# Altium PCB MergeBoard.PcbDoc
Units mil, origin at the board's own origin, x right, y up, seen from the top; angles counter-clockwise.
Board outline 5500 x 4413.39 mil, 2 copper layers (Top Layer, Bottom Layer); 55 components, 46 nets, 339 pads, 84 vias.
Unrouted connection lines stored in the file: 3.
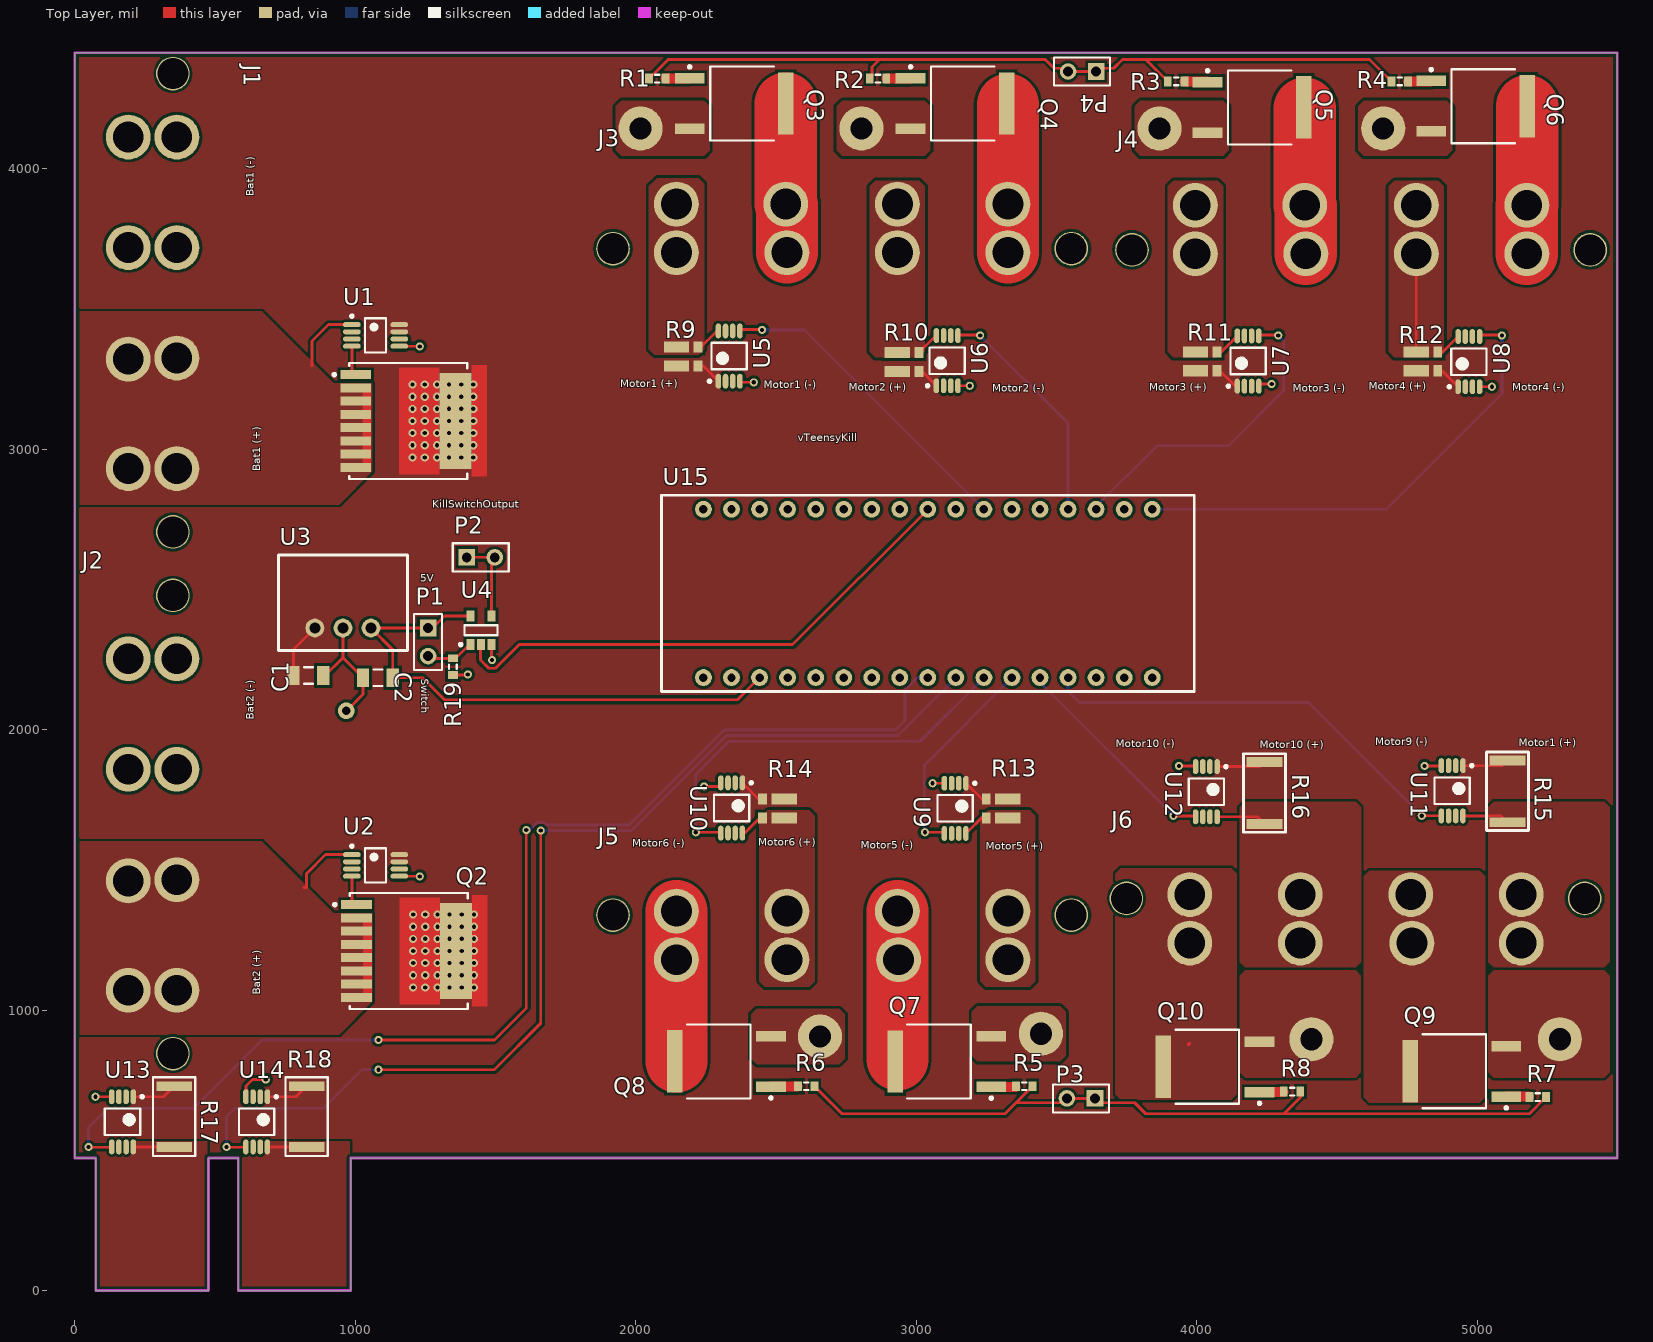
[diagram p0: Top Layer view]
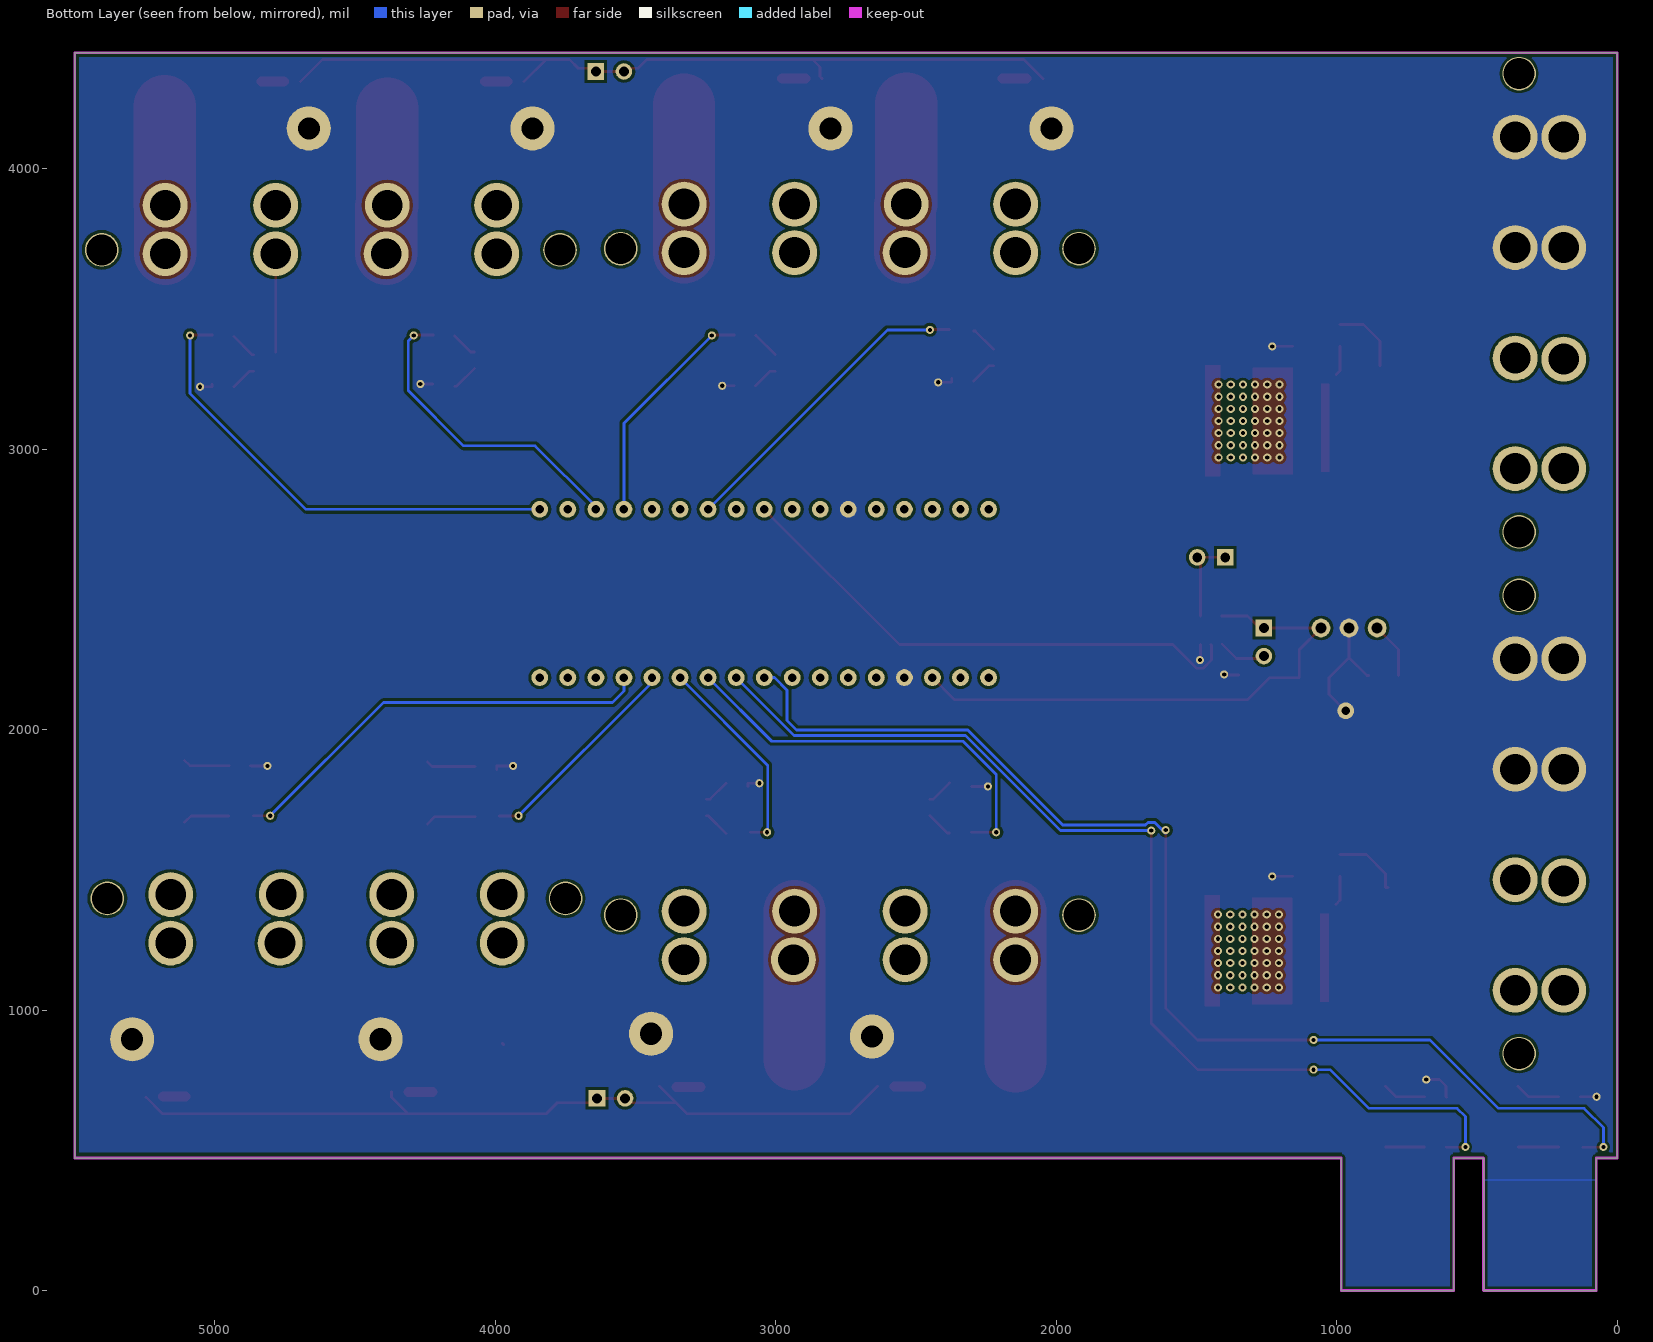
[diagram p1: Bottom Layer view, seen from below]

## Layer stack, top to bottom
Top Solder: solder mask 0.4, Solder Resist, Dk 3.5
Top Layer: signal copper 1.4
Dielectric 1: dielectric 12.6, FR-4, Dk 4.8
Bottom Layer: signal copper 1.4
Bottom Solder: solder mask 0.4, Solder Resist, Dk 3.5

## Board outline
74.8,472.44 74.8,0 476.38,0 476.38,472.44 582.68,472.44 582.68,0 984.25,0 984.25,472.44 5500,472.44 5500,4413.39 0,4413.39 0,472.44

## Design rules (kind name [scope] priority, off if disabled: settings)
Clearance [All] p1: gap=10
PolygonConnect PolygonConnect_8 [All vs IsNamedPolygon('GND')] p1: connectstyle=Direct reliefconductorwidth=10 reliefentries=4 polygonreliefangle="90 Angle" airgapwidth=10
PolygonConnect PolygonConnect_7 [All vs IsNamedPolygon('PWR')] p2: connectstyle=Direct reliefconductorwidth=10 reliefentries=4 polygonreliefangle="90 Angle" airgapwidth=10
PolygonConnect PolygonConnect_6 [All vs IsNamedPolygon('Power')] p3: connectstyle=Direct reliefconductorwidth=10 reliefentries=4 polygonreliefangle="90 Angle" airgapwidth=10
PolygonConnect PolygonConnect_5 [All vs IsNamedPolygon('Power')] p4: connectstyle=Direct reliefconductorwidth=10 reliefentries=4 polygonreliefangle="90 Angle" airgapwidth=10
PolygonConnect PolygonConnect_4 [All vs IsNamedPolygon('VideoRayTrace')] p5: connectstyle=Direct reliefconductorwidth=10 reliefentries=4 polygonreliefangle="90 Angle" airgapwidth=10
PolygonConnect PolygonConnect_3 [All vs IsNamedPolygon('T100Trace')] p6: connectstyle=Direct reliefconductorwidth=10 reliefentries=4 polygonreliefangle="90 Angle" airgapwidth=10
PolygonConnect PolygonConnect_2 [All vs IsNamedPolygon('Top Layer-No Net')] p7: connectstyle=Direct reliefconductorwidth=10 reliefentries=4 polygonreliefangle="90 Angle" airgapwidth=10
PolygonConnect PolygonConnect_1 [All vs IsNamedPolygon('Top Layer-No Net')] p8: connectstyle=Direct reliefconductorwidth=10 reliefentries=4 polygonreliefangle="90 Angle" airgapwidth=10
PolygonConnect [All] p9: connectstyle=Relief reliefconductorwidth=10 reliefentries=4 polygonreliefangle="90 Angle" airgapwidth=10
RoutingVias [All] p1: holewidth=28 width=50 viastyle="Through Hole" minholewidth=28 minwidth=50 maxholewidth=28 maxwidth=50
SolderMaskExpansion [All] p1: expansion=4
Width [All] p1: maxlimit=1181.1 minlimit=10 preferedwidth=10
30 further rules are at their usual default settings.

## Classes and differential pairs
component class U_5V_Converter: C1 C2 U3
component class U_KillSwitch_MotorOut: J3 J4 J5 J6 P1 Q3 Q4 Q5 Q6 Q7 Q8 Q9 Q10 R1 R2 R3 R4 R5 R6 R7 R8 R19 U4
component class U_Merge: J1 J2 Q2 U1 U2
component class U_PowerOutCurrentMonitor: R17 R18 U13 U14
component class U_T100CurrentMonitor: R9 R10 R11 R12 R13 R14 U5 U6 U7 U8 U9 U10
component class U_Teensy3_5: U15
component class U_VidRayCurrentMonitor: R15 R16 U11 U12

## Components (designator, comment, footprint, x,y, rotation, side; value= is the part's Value field where it differs from the comment)
C1 "Cap Semi" C1206 832.68,2192.91 r180 top
C2 "Cap Semi" C1206 1080.71,2185.04 r0 top
J1 "Molex 42819-4224" MOLEX_42819-4224 190.94,2930.87 r90 top
J2 "Molex 42819-4224" MOLEX_42819-4224 190.94,1070.63 r90 top
J3 "Molex 42819-4224" MOLEX_42819-4224 2145.37,3873.79 r0 top
J4 "Molex 42819-4224" MOLEX_42819-4224 3995.54,3869.63 r0 top
J5 "Molex 42819-4224" MOLEX_42819-4224 3327.29,1179.58 r180 top
J6 "Molex 42819-4224" MOLEX_42819-4224 5157.86,1238.99 r180 top
P1 "Header 2" HDR1X2 1259.84,2362.2 r270 top
P2 "KillHeader" HDR1X2 1397.64,2614.17 r0 top
P3 "KillHeader" HDR1X2 3637.8,685.04 r180 top
P4 "KillHeader" HDR1X2 3641.73,4346.46 r180 top
Q2 "IPT004N03L" INF-PG-HSOF-8-1_V 1210.63,1210.63 r0 top
Q3 "IRLR6225" IRLR6225 2352.36,4232.28 r0 top
Q4 "IRLR6225" IRLR6225 3139.76,4232.28 r0 top
Q5 "IRLR6225" IRLR6225 4198.82,4218.5 r0 top
Q6 "IRLR6225" IRLR6225 4996.06,4222.87 r0 top
Q7 "IRLR6225" IRLR6225 3108.39,816.38 r180 top
Q8 "IRLR6225" IRLR6225 2322.83,816.93 r180 top
Q9 "IRLR6225" IRLR6225 4945,781.53 r180 top
Q10 "IRLR6225" IRLR6225 4064.96,797.6 r180 top
R1 "Res3" J1-0603 2076.77,4320.87 r180 top
R2 "Res3" J1-0603 2864.17,4320.87 r180 top
R3 "Res3" J1-0603 3927.17,4311.02 r180 top
R4 "Res3" J1-0603 4724.41,4311.02 r180 top
R5 "Res3" J1-0603 3385.83,728.35 r0 top
R6 "Res3" J1-0603 2608.27,728.35 r0 top
R7 "Res3" J1-0603 5216.54,689.33 r0 top
R8 "Res3" J1-0603 4340.55,709.01 r0 top
R9 "Res3" Resistor075mohms 2190.95,3297.24 r90 top
R10 "Res3" Resistor075mohms 2978.35,3277.56 r90 top
R11 "Res3" Resistor075mohms 4041.34,3279.53 r90 top
R12 "Res3" Resistor075mohms 4828.74,3279.53 r90 top
R13 "Res3" Resistor075mohms 3281.5,1751.97 r270 top
R14 "Res3" Resistor075mohms 2484.25,1751.97 r270 top
R15 "Res3" Resistor03mOhm 5108.27,1779.88 r270 top
R16 "Res3" Resistor03mOhm 4242.13,1773.98 r270 top
R17 "Res3" Resistor05MOHM 354.33,620.08 r270 top
R18 "Res3" Resistor05MOHM 826.77,620.08 r270 top
R19 "Res3" J1-0603 1348.43,2224.41 r90 top
U1 "LTC4357CMS8#PBF" LT-MS8-8_N 1072.83,3405.51 r0 top
U2 "LTC4357CMS8#PBF" LT-MS8-8_N 1072.83,1515.75 r0 top
U3 "Recom-785.0-1.0" Recom-78E5.0-1.0 856.3,2362.2 r0 top
U4 "U?" NC7SZ08M5X 1448.82,2354.33 r90 top (schematic designator NC7SZ08M5X)
U5 "CurrentMonitor" AD8217 2333.15,3331.81 r90 top
U6 "CurrentMonitor" AD8217 3110.71,3315.43 r90 top
U7 "CurrentMonitor" AD8217 4183.54,3314.06 r90 top
U8 "CurrentMonitor" AD8217 4970.94,3312.01 r90 top
U9 "CurrentMonitor" AD8217 3139.29,1719.21 r270 top
U10 "CurrentMonitor" AD8217 2342.05,1720.59 r270 top
U11 "CurrentMonitor" AD8217 4911.42,1781.85 r270 top
U12 "CurrentMonitor" AD8217 4034.96,1778.62 r270 top
U13 "CurrentMonitor" AD8217 170.28,601.38 r270 top
U14 "CurrentMonitor" AD8217 648.62,601.38 r270 top
U15 "ArduinoMicro" ArduinoMicro 2241.73,2185.43 r0 top

## Footprints (in the part's own frame and the unit in brackets; to place one, negate y for a bottom-side part, rotate by r counter-clockwise, add the part's x,y. Pads: shape width x height; smd on the part's side, far side on the other; paste and mask are expansions set on the pad)
AD8217 [mm] "CurrentMonitor"
  oval 1.35x0.5 smd: 1(-2.275,0.975) 2(-2.275,0.325) 3(-2.275,-0.325) 4(-2.275,-0.975) 5(2.275,-0.975) 6(2.275,-0.325) 7(2.275,0.325) 8(2.275,0.975)
  silkscreen extent -2.4,-1.6 1.2,1.9, body extent -2.45,-1.6 2.45,1.6, height 1.1
ArduinoMicro [mil]
  round 60 hole 30: 1(0,0) 1-2(0,600) 2(100,0) 2-2(100,600) 3(200,0) 3-2(200,600) 4(300,0) 4-2(300,600) 5(400,0) 5-2(400,600) 6(500,0) 6-2(500,600) 7(600,0) 7-2(600,600) 8(700,0) 8-2(700,600) 9(800,0) 9-2(800,600) 10(900,0) 10-2(900,600) 11(1000,0) 11-2(1000,600) 12(1100,0) 12-2(1100,600) 13(1200,0) 13-2(1200,600) 14(1300,0) 14-2(1300,600) 15(1400,0) 15-2(1400,600) 16(1500,0) 16-2(1500,600) 17(1600,0) 17-2(1600,600)
  silkscreen extent -150,-50 1750,650
C1206 [mm] "Chip Capacitor, Body 3.2x1.6mm, IPC High Density"
  rect 1.1x1.7 smd: 1(-1.35,0) 2(1.35,0)
  silkscreen extent -0.4,-0.75 0.4,0.75, body extent -1.7,-0.9 1.7,0.9, height 1.3
HDR1X2 [mm] "Connector; Header; 2 Position"
  rect 1.5x1.5 hole 0.9: 1(0,0)
  round 1.5 hole 0.9: 2(2.54,0)
  silkscreen extent -1.27,-1.27 3.81,1.27
INF-PG-HSOF-8-1_V [mm] "HSOF, 8-Leads, Body 11.675x9.9mm, Pitch 1.2mm"
  rect 2.8x0.8 smd: 1(-5.249,4.2) 2(-5.249,3) 3(-5.249,1.8) 4(-5.249,0.6) 5(-5.249,-0.6) 6(-5.249,-1.8) 7(-5.249,-3) 8(-5.249,-4.2)
  rect 2.9x8.7 smd: 9(3.8,0)
  Top Layer region: -4.65,3.4 -4.65,-4.6 -3.85,-4.6 -3.85,3.4
  Top Layer region: 5.25,5.05 5.25,-5.05 6.65,-5.05 6.65,5.05
  Top Layer region: -1.35,4.85 -1.35,-4.85 2.35,-4.85 2.35,4.85
  silkscreen extent -7.32,-5.25 4.85,5.25, body extent -5.84,-4.95 5.84,4.95, height 2.4
IRLR6225 [mm] "D-PAK, 3-Pads, Body 6.21x6.73mm (max), IPC High Density"
  rect 2.7x0.95 smd: 1(-4.05,2.29) 2(-4.05,-2.29)
  rect 1.4x5.65 smd: Tab(4.65,0)
  silkscreen extent -4.17,-3.35 3.55,3.44, body extent -2.2,-3.37 4.02,3.37, height 2.38
J1-0603 [mm] "Chip Resistor, Body 1.6x0.8mm, IPC High Density"
  rect 0.7x0.9 smd: 1(-0.75,0) 2(0.75,0)
  silkscreen extent -0.2,-0.35 0.2,0.35, body extent -0.85,-0.48 0.85,0.48, height 0.9
LT-MS8-8_N [mm] "SOP, 8-Leads, Body 3.1x3.1mm, Pitch 0.65mm, IPC Medium Density"
  oval 1.6x0.45 smd: 1(-2.15,0.975) 2(-2.15,0.325) 3(-2.15,-0.325) 4(-2.15,-0.975) 5(2.15,-0.975) 6(2.15,-0.325) 7(2.15,0.325) 8(2.15,0.975)
  silkscreen extent -2.27,-1.55 0.95,1.87, body extent -1.55,-1.55 1.55,1.55, height 1.1
MOLEX_42819-4224 [mil]
  round 160 hole 110: 1(0,0) 1(0,-173) 2(390,0) 2(394,-173) 3(788,-173) 3(788,0) 4(1182,-173) 4(1182,0)
  round 120 hole 110: NC(-226,-159) NC(1408,-159)
  body extent -269,-380 1456,176, height 826
NC7SZ08M5X [mm] "NC7SZ08M5X"
  rect 1x0.7 smd: 1(-1.3,0.95) 2(-1.3,0) 3(-1.3,-0.95) 4(1.3,-0.95) 5(1.3,0.95)
  silkscreen extent -1.42,-1.5 0.45,1.97, body extent -0.85,-1.5 0.85,1.5, height 1.45
Recom-78E5.0-1.0 [mm]
  round 1.7 hole 1: 1(0,0) 2(2.54,0) 3(5.08,0)
  silkscreen extent -3.3,-2.03 8.38,6.6, body extent -3.3,-2.03 8.38,6.6, height 10.4
Resistor03mOhm [mm]
  rect 0.9x3.25 smd: 1(-2.8,0) 2(2.8,0)
  silkscreen extent -3.56,-1.91 3.56,1.91
Resistor05MOHM [mm]
  rect 0.9x3.2 smd: 1(-2.75,0) 2(2.75,0)
  silkscreen extent -3.56,-1.91 3.56,1.91
Resistor075mohms [mm]
  rect 1x2.3 smd: 1(0,1.15) 2(1.7,1.15)
  rect 1x0.8 smd: 1(0,-0.8) 2(1.7,-0.8)
  body extent -0.06,-0.89 1.59,2.16, height 0.65

## Part data
C1 C2: "Capacitor (Semiconductor SIM Model)"
J1 J2 J3 J4 J5 J6: library part Molex_42819-4224
P1: "Header, 2-Pin"
Q2: "N-Channel OptiMOS(TM) Power-MOSFET, 30 V VDS, 300 A ID, -55 to 175 degC, PG-HSOF-8, Reel, Green"
R1 R2 R3 R4 R5 R6 R7 R8 R9 R10 R11 R12 R13 R14 R15 R16 R17 R18 R19: "Resistor"
U1 U2: "Positive High Voltage Ideal Diode Controller, 9 to 80 V Vin, 8-pin SOP (MS8-8), 0 to 70 degC, Pb-Free"
U4: library part NC7SZ08M5X
U5 U6 U7 U8 U9 U10 U11 U12 U13 U14: library part AD8217

## Free pads (board coordinates)
  rect 110.24x31.5 smd: 1(1001.99,3265.75) 2(1001.99,3218.5) 3(1001.99,3171.26) 4(1001.99,3124.02) 5(1001.99,3076.77) 6(1001.99,3029.53) 7(1001.99,2982.28) 8(1001.99,2935.04)
  round 29.02 hole 15: 2(49.21,511.81) 2(73.82,690.94) 2(541.34,511.81) 2(681.1,751.97) 2(1082.68,787.4) 2(1082.68,893.7) 2(1230.31,1476.38) 2(1230.31,3366.14) 2(1401.57,2196.85) 2(1488.19,2248.03) 2(1610.24,1641.73) 2(1661.42,1639.76) 2(2214.57,1633.86) 2(2244.09,1797.24) 2(2421.26,3238.19) 2(2450.79,3425.2) 2(3031.5,1633.86) 2(3058.78,1808.78) 2(3191.46,3225.87) 2(3228.35,3405.51) 2(3917.32,1692.91) 2(3937.01,1870.43) 2(4267.72,3232.28) 2(4291.34,3405.51) 2(4803.15,1692.91) 2(4812.99,1870.43) 2(5053.15,3222.44) 2(5088.58,3405.51)
  round 157.48 hole 78.74: 3(2017.72,4143.7) 3(2657.48,905.51) 3(2805.12,4143.7) 3(3444.88,915.35) 3(3868.11,4143.7) 3(4409.45,896.02) 3(4665.35,4143.7) 3(5295.28,896.02)
  round 60 hole 30: 4(968.5,2066.93)
  rect 114.17x342.52 smd: 9(1358.27,3100.39)

## Via types
v1: diameter 29.02, hole 15, Top Layer to Bottom Layer, 84 vias

## Nets (pads, with @x,y where several pads share a name; then routed paths per layer and width w, separated by ;. In a path a pad name is that pad's centre, name@x,y a point inside that pad or via, vN(x,y) a via of type N, cw(c..) or ccw(c..) an arc to the next point about the centre after c; other vN are vias at no path point)
5V: C2.2 P1.1 U3.3 U4.5 U15.3 | length 1955.6
  Top Layer w10: U4.5 1318.9,2405.51 1275.59,2362.2 P1.1 U3.3 1133.86,2284.65 C2.2 1240.16,2185.04 1318.9,2106.3 2362.6,2106.3 U15.3
14.8V: C1.2 pad.9 Q2.9 R9.1 R10.1 R11.1 R12.1 R13.1 R14.1 R15.1 R16.1 R17.1 R18.1 U1.7 U1.8 U2.7 U2.8 U3.1 U5.1 U6.1 U7.1 U8.1 U9.1 U10.1 U11.1 U12.1 U13.1 U14.1 | length 1422
  Top Layer w10: U13.1 316.93,690.94 R17.1 ; U14.1 789.37,690.94 R18.1 ; C1.2 779.53,2285.43 U3.1 ; R9.1@2224.41,3297.24 2239.76,3297.24 U5.1 ; U10.1 2438.62,1751.97 R14.1@2450.79,1751.97 ; R10.1@3001.97,3277.56 3020.63,3277.56 U6.1 ; U9.1 3234.49,1751.97 R13.1@3248.03,1751.97 ; U12.1 4226.1,1868.19 R16.1 ; R11.1@4074.8,3287.4 4137.72,3224.49 U7.1 ; R12.1@4862.2,3277.56 4877.44,3277.56 U8.1 ; U11.1 5089.57,1871.42 R15.1
  other v1: 1206.69,1080.71 1250,1080.71 1293.31,1080.71 1336.61,1080.71 1379.92,1080.71 1423.23,1080.71 1206.69,1124.02 1250,1124.02 1293.31,1124.02 1336.61,1124.02 1379.92,1124.02 1423.23,1124.02 1206.69,1167.32 1250,1167.32 1293.31,1167.32 1336.61,1167.32 1379.92,1167.32 1423.23,1167.32 1206.69,1210.63 1250,1210.63 1293.31,1210.63 1336.61,1210.63 1379.92,1210.63 1423.23,1210.63 1206.69,1253.94 1250,1253.94 1293.31,1253.94 1336.61,1253.94 1379.92,1253.94 1423.23,1253.94 1206.69,1297.24 1250,1297.24 1293.31,1297.24 1336.61,1297.24 1379.92,1297.24 1423.23,1297.24 1206.69,1340.55 1250,1340.55 1293.31,1340.55 1336.61,1340.55 1379.92,1340.55 1423.23,1340.55 1204.72,2970.47 1248.03,2970.47 1291.34,2970.47 1334.65,2970.47 1377.95,2970.47 1421.26,2970.47 1204.72,3013.78 1248.03,3013.78 1291.34,3013.78 1334.65,3013.78 1377.95,3013.78 1421.26,3013.78 1204.72,3057.09 1248.03,3057.09 1291.34,3057.09 1334.65,3057.09 1377.95,3057.09 1421.26,3057.09 1204.72,3100.39 1248.03,3100.39 1291.34,3100.39 1334.65,3100.39 1377.95,3100.39 1421.26,3100.39 1204.72,3143.7 1248.03,3143.7 1291.34,3143.7 1334.65,3143.7 1377.95,3143.7 1421.26,3143.7 1204.72,3187.01 1248.03,3187.01 1291.34,3187.01 1334.65,3187.01 1377.95,3187.01 1421.26,3187.01 1204.72,3230.31 1248.03,3230.31 1291.34,3230.31 1334.65,3230.31 1377.95,3230.31 1421.26,3230.31
ANALOGOUT1: pad.2@2450.79,3425.2 U5.5 U15.11-2 | length 1129.8
  Top Layer w10: U5.5@2381,3426.18 pad.2@2449.8,3426.18 ; U15.11-2@3238.19,2788.98 U15.11-2
  Bottom Layer w10: pad.2@2450.79,3425.2 2601.97,3425.2 U15.11-2
ANALOGOUT2: pad.2@3228.35,3405.51 U6.5 U15.14-2 | length 820.9
  Top Layer w10: U6.5@3148.72,3406.5 pad.2@3217.52,3406.5 ; U15.14-2 U15.14-2@3543.31,2787.01
  Bottom Layer w10: pad.2@3228.35,3405.51 3541.73,3092.13 U15.14-2
ANALOGOUT3: pad.2@4291.34,3405.51 U7.5 U15.15-2 | length 1124.2
  Top Layer w10: U7.5@4221.55,3406.5 pad.2@4290.35,3406.5
  Bottom Layer w10: U15.15-2 3641.73,2795.28 3858.27,3011.81 4114.17,3011.81 4311.02,3208.66 4311.02,3385.83 pad.2@4291.34,3405.51
ANALOGOUT4: pad.2@5088.58,3405.51 U8.5 U15.17-2 | length 1710.1
  Top Layer w10: U15.17-2@3838.58,2788.58 U15.17-2 ; U8.5@5009.84,3406.5 pad.2@5087.6,3406.5
  Bottom Layer w10: U15.17-2@3838.58,2785.43 U15.17-2 4675.2,2785.43 5088.58,3198.82 pad.2@5088.58,3405.51
ANALOGOUT5: pad.2@3031.5,1633.86 U9.5 U15.12 | length 741
  Top Layer w10: pad.2@3031.5,1633.86 3090.55,1633.86
  Bottom Layer w10: pad.2@3031.5,1633.86 3029.27,1636.08 3029.27,1872.97 U15.12
ANALOGOUT6: pad.2@2214.57,1633.86 U10.5 U15.11 | length 1465.8
  Top Layer w10: pad.2@2214.57,1633.86 U10.5@2303.66,1633.86
  Bottom Layer w10: pad.2@2214.57,1633.86 2214.57,1785.04 ; 2214.59,1785.02 2214.59,1840.57 2332.68,1958.66 3014.96,1958.66 U15.11
ANALOGOUT7: pad.2@4803.15,1692.91 U11.5 U15.14 | length 1562.4
  Top Layer w10: pad.2@4793.4,1692.91 4803.15,1692.91 4862.2,1692.91
  Bottom Layer w10: U15.14 3541.73,2137.4 3582.68,2096.46 4399.61,2096.46 pad.2@4803.15,1692.91
ANALOGOUT8: pad.2@3917.32,1692.91 U12.5 U15.13 | length 758.3
  Top Layer w10: pad.2@3918.31,1691.93 U12.5@3987.11,1691.93
  Bottom Layer w10: U15.13 3441.73,2168.5 pad.2@3917.32,1692.91
ANALOGOUT9: pad.2@49.21,511.81 pad.2@1082.68,893.7 pad.2@1610.24,1641.73 U13.5 U15.9 | length 4256.6
  Top Layer w10: pad.2@50.2,510.83 U13.5@122.05,510.83 ; pad.2@1082.68,893.7 1496.06,893.7 1610.24,1007.87 pad.2@1610.24,1641.73
  Bottom Layer w10: pad.2@49.21,511.81 49.21,580.71 118.11,649.61 423.23,649.61 667.32,893.7 pad.2@1082.68,893.7 ; pad.2@1610.24,1641.73 1610.24,1630.31 1649.19,1669.27 1673.64,1669.27 1683.15,1659.76 1977.21,1659.76 2316.11,1998.66 2926.68,1998.66 2960.37,2032.36 2960.37,2140.43 3005.37,2185.43 U15.9
ANALOGOUT10: pad.2@541.34,511.81 pad.2@1082.68,787.4 pad.2@1661.42,1639.76 U14.5 U15.10 | length 3827.4
  Top Layer w10: pad.2@542.32,510.83 U14.5 ; pad.2@1082.68,787.4 1496.06,787.4 1661.42,952.76 pad.2@1661.42,1639.76
  Bottom Layer w10: pad.2@541.34,511.81 541.34,620.08 570.87,649.61 885.83,649.61 1023.62,787.4 pad.2@1082.68,787.4 ; pad.2@1661.42,1639.76 1985.5,1639.76 2324.39,1978.66 2934.96,1978.66 U15.10
GENERAL14.8V: R17.2 U13.8 | length 145.7
  Top Layer w10: U13.8 R17.2
GND: C1.1 C2.1 J1.3 J1.4 J2.3 J2.4 pad.2@73.82,690.94 pad.2@681.1,751.97 pad.2@1230.31,1476.38 pad.2@1230.31,3366.14 pad.2@1401.57,2196.85 pad.2@1488.19,2248.03 pad.2@2244.09,1797.24 pad.2@2421.26,3238.19 pad.2@3058.78,1808.78 pad.2@3191.46,3225.87 pad.2@3937.01,1870.43 pad.2@4267.72,3232.28 pad.2@4812.99,1870.43 pad.2@5053.15,3222.44 pad.3@2017.72,4143.7 pad.3@2657.48,905.51 pad.3@2805.12,4143.7 pad.3@3444.88,915.35 pad.3@3868.11,4143.7 pad.3@4409.45,896.02 pad.3@4665.35,4143.7 pad.3@5295.28,896.02 pad.4@968.5,2066.93 Q3.2 Q4.2 Q5.2 Q6.2 Q7.2 Q8.2 Q9.2 Q10.2 R19.1 U1.5 U2.5 U3.2 U4.3 U5.4 U6.4 U7.4 U8.4 U9.4 U10.4 U11.4 U12.4 U13.4 U14.4 U15.4 U15.6-2 | length 1323.4
  Top Layer w10: pad.2@73.82,690.94 U13.4 ; U14.4@608.27,688.98 U14.4 610.98,691.69 610.98,729.42 633.54,751.97 pad.2@681.1,751.97 ; C1.1 892.91,2192.91 956.3,2256.3 ; U3.2 956.3,2256.3 ; pad.4@968.5,2066.93 1027.56,2125.98 C2.1 956.3,2256.3 ; U2.5 1229.33,1477.36 pad.2@1230.31,1476.38 ; U1.5 pad.2@1229.33,3367.13 ; R19.1 1399.61,2194.88 pad.2@1401.57,2196.85 ; U4.3 1486.22,2250 pad.2@1488.19,2248.03 ; pad.2@2244.09,1797.24 U10.4@2302.17,1797.24 ; U5.4@2373.03,3251.97 2373.03,3238.19 pad.2@2421.26,3238.19 ; pad.2@3058.78,1808.78 3099.41,1808.78 U9.4@3099.41,1797.24 ; U6.4 pad.2@3191.46,3225.87 ; pad.2@3937.01,1870.43 3995.08,1870.43 U12.4@3995.08,1856.65 ; U7.4@4223.43,3232.28 pad.2@4267.72,3232.28 ; pad.2@4812.99,1870.43 4872.05,1870.43 U11.4 ; U8.4@5010.83,3232.28 5010.83,3222.44 pad.2@5053.15,3222.44
"KILL OUT": P2.1 P2.2 P3.1 P3.2 P4.1 P4.2 R1.2 R2.2 R3.2 R4.2 R5.2 R6.2 R7.2 R8.2 U4.4 U15.10-2 | length 6118
  Top Layer w10: P2.1 P2.2 1486.22,2602.76 U4.4 ; R1.2 2116.14,4389.76 2870.08,4389.76 ; R6.2 2735.87,630.27 3317.28,630.27 3356.3,669.29 ; R2.2 2842.52,4328.74 2842.52,4362.2 2870.08,4389.76 ; R5.2 3356.3,669.29 ; P3.2 P3.1 ; P4.2@3537.8,4358.27 3492.13,4358.27 3460.63,4389.76 2870.08,4389.76 ; P3.2@3539.66,669.29 3356.3,669.29 ; P4.2 P4.1 ; P4.1@3637.8,4358.27 3704.72,4358.27 3736.22,4389.76 3818.9,4389.76 ; P3.1@3657.48,669.29 3779.53,669.29 3818.72,630.1 4311.2,630.1 ; R3.2 3818.9,4389.76 ; R8.2 4370.08,688.98 4311.2,630.1 ; R4.2 4616.14,4389.76 3818.9,4389.76 ; R7.2 5186.83,630.1 4311.2,630.1
MOTOR1: J3.1 R9.2 U5.8 | length 97.3
  Top Layer w10: R9.2@2224.41,3356.3 2289.49,3421.38 U5.8
MOTOR1KILL: J3.2 Q3.Tab | length 533.2
  Top Layer w10: J3.2@2535.37,3873.79 J3.2@2539.37,3869.79 ; Q3.Tab@2535.37,4232.22 Q3.Tab
  Top Layer w221.65: J3.2@2535.37,3873.79 Q3.Tab@2535.37,4232.22 ; J3.2@2539.37,3700.79 J3.2@2539.37,3869.79
MOTOR2: J3.3 R10.2 U6.8 | length 98.7
  Top Layer w10: R10.2@3001.97,3336.61 3070.35,3405 U6.8
MOTOR2KILL: J3.4 Q4.Tab | length 533.4
  Top Layer w10: Q4.Tab Q4.Tab@3327.37,4227.75
  Top Layer w221.65: J3.4@3327.37,3700.79 3327.37,3873.79 Q4.Tab@3327.37,4227.75
MOTOR3: J4.1 R11.2 U7.8 | length 94
  Top Layer w10: R11.2@4074.8,3346.46 4087.99,3346.46 U7.8
MOTOR3KILL: J4.2 Q5.Tab | length 525
  Top Layer w10: Q5.Tab Q5.Tab@4385.54,4214.85 ; J4.2@4385.54,3869.63 J4.2@4389.54,3865.63
  Top Layer w221.65: J4.2@4385.54,3869.63 Q5.Tab@4385.54,4214.85 ; J4.2@4389.54,3696.63 J4.2@4389.54,3865.63
MOTOR4: J4.3 R12.2 U8.8 | length 447.5
  Top Layer w10: R12.2@4783.46,3346.46 4783.46,3696.55 J4.3@4783.54,3696.63 ; R12.2@4862.2,3336.61 4867.6,3336.61 U8.8
MOTOR4KILL: J4.4 Q6.Tab | length 526.9
  Top Layer w10: J4.4@5177.54,3869.63 J4.4@5179.13,3871.22
  Top Layer w221.65: J4.4@5177.54,3696.63 J4.4@5177.54,3869.63 ; J4.4@5179.13,3871.22 Q6.Tab
MOTOR5: J5.1 R13.2 U9.8 | length 96.6
  Top Layer w10: U9.8 3240.95,1692.91 R13.2@3248.03,1692.91
MOTOR5KILL: J5.2 Q7.Tab | length 539.5
  Top Layer w10: Q7.Tab Q7.Tab@2933.29,824.35
  Top Layer w221.65: Q7.Tab@2933.29,824.35 J5.2@2933.29,1352.58
MOTOR6: J5.3 R14.2 U10.8 | length 96
  Top Layer w10: U10.8 2388.9,1631.02 R14.2@2450.79,1692.91
MOTOR6KILL: J5.4 Q8.Tab | length 535.7
  Top Layer w221.65: Q8.Tab@2145.29,816.93 2145.29,1179.58 J5.4@2145.29,1352.58
MOTOR7: J6.1 R15.2 U11.8 | length 167.8
  Top Layer w10: U11.8 5085.63,1692.28 R15.2
MOTOR7KILL: J6.2 Q9.Tab
MOTOR8: J6.3 R16.2 U12.8 | length 179.3
  Top Layer w10: U12.8 4216.81,1689.05 R16.2
MOTOR8KILL: J6.4 Q10.Tab | length 7.6
  Top Layer w10: 3970.47,876.34 3975.86,881.72
NetJ1_1: J1.1 J1.2 pad.2@1001.99,3218.5 pad.3@1001.99,3171.26 pad.4@1001.99,3124.02 pad.5 pad.6 pad.7 pad.8 U1.1 | length 254.4
  Top Layer w10: 846.46,3297.24 846.46,3385.83 904.53,3443.9 U1.1
NetJ2_1: J2.1 J2.2 Q2.2 Q2.3 Q2.4 Q2.5 Q2.6 Q2.7 Q2.8 U2.1 | length 248.6
  Top Layer w10: 816.93,1437.01 826.77,1437.01 826.77,1486.22 894.69,1554.13 U2.1
NetNC7SZ08M5X_1: P1.2 R19.2 U4.1 | length 174.2
  Top Layer w10: P1.2 1268.11,2253.94 R19.2 1358.27,2253.94 U4.1@1409.45,2305.12
NetQ1_1: pad.1 U1.4 | length 107.1
  Top Layer w10: U1.4 988.19,3279.55 pad.1
NetQ2_1: Q2.1 U2.4 | length 106.5
  Top Layer w10: U2.4 988.19,1391.75 Q2.1@1002.95,1376.99
NetQ3_1: Q3.1 R1.1 | length 87.3
  Top Layer w10: Q3.1@2191.34,4320.87 Q3.1
  Top Layer w35.43: R1.1 Q3.1@2191.34,4320.87
NetQ4_1: Q4.1 R2.1 | length 87.3
  Top Layer w10: Q4.1@2978.74,4320.87 Q4.1
  Top Layer w35.43: R2.1 Q4.1@2978.74,4320.87
NetQ5_1: Q5.1 R3.1 | length 83.7
  Top Layer w10: Q5.1@4037.01,4311.02 Q5.1
  Top Layer w35.43: R3.1 Q5.1@4037.01,4311.02
NetQ6_1: Q6.1 R4.1 | length 83.5
  Top Layer w10: Q6.1@4834.61,4311.02 Q6.1
  Top Layer w35.43: R4.1 Q6.1@4834.61,4311.02
NetQ7_1: Q7.1 R5.1 | length 89.3
  Top Layer w10: R5.1@3354.17,726.22 R5.1
  Top Layer w35.43: Q7.1 R5.1@3354.17,726.22
NetQ8_1: Q8.1 R6.1 | length 97.1
  Top Layer w10: R6.1@2577.17,726.77 R6.1
  Top Layer w35.43: Q8.1 R6.1@2577.17,726.77
NetQ9_1: Q9.1 R7.1 | length 83.4
  Top Layer w10: R7.1@5184.96,691.38 R7.1
  Top Layer w35.43: Q9.1 R7.1@5184.96,691.38
NetQ10_1: Q10.1 R8.1 | length 85
  Top Layer w35.43: Q10.1 R8.1@4309.45,707.44
POWERBOARD14.8V: R18.2 U14.8 | length 139.8
  Top Layer w10: U14.8 R18.2
TEENSYKILL: U4.2 U15.9-2 | length 1898.1
  Top Layer w10: U4.2 1446.85,2301.18 1446.85,2247.64 1475.97,2218.52 1500.41,2218.52 1585.04,2303.15 2559.45,2303.15 U15.9-2
pads on no net: J1.NC J2.NC J3.NC J4.NC J5.NC J6.NC U1.2 U1.3 U1.6 U2.2 U2.3 U2.6 U5.2 U5.3 U5.6 U5.7 U6.2 U6.3 U6.6 U6.7 U7.2 U7.3 U7.6 U7.7 U8.2 U8.3 U8.6 U8.7 U9.2 U9.3 U9.6 U9.7 U10.2 U10.3 U10.6 U10.7 U11.2 U11.3 U11.6 U11.7 U12.2 U12.3 U12.6 U12.7 U13.2 U13.3 U13.6 U13.7 U14.2 U14.3 U14.6 U14.7 U15.1 U15.1-2 U15.2 U15.2-2 U15.3-2 U15.4-2 U15.5 U15.5-2 U15.6 U15.7 U15.7-2 U15.8 U15.8-2 U15.12-2 U15.13-2 U15.15 U15.16 U15.16-2 U15.17

## Polygon pours and split planes (outlines as drawn)
14.8V on Top Layer "PWR" (solid, pour order 65): 0,4413.39 0,492.13 5501.97,492.13 5500,494.09 5500,4413.39
GND on Top Layer "T100Trace" (solid, pour order 50): 5472.44,777.91 5472.44,1122.4 5452.76,1142.09 5059.05,1142.09 5039.37,1122.4 5039.37,777.91 5059.06,758.23 5452.76,758.23
GND on Top Layer "T100Trace" (solid, pour order 48): 4586.61,777.91 4586.61,1122.4 4566.93,1142.09 4173.23,1142.09 4153.54,1122.4 4153.54,777.91 4173.23,758.23 4566.93,758.23
MOTOR7 on Top Layer "VideoRayTrace" (solid, pour order 46): 5039.37,1171.61 5059.06,1151.93 5452.76,1151.93 5472.44,1171.61 5472.44,1722.79 5452.76,1742.48 5059.06,1742.48 5039.37,1722.79
MOTOR7KILL on Top Layer "VideoRayTrace" (solid, pour order 44): 4596.46,689.33 4616.14,669.64 5009.84,669.64 5029.53,689.33 5029.53,1476.73 5009.84,1496.42 4616.14,1496.42 4596.46,1476.73
MOTOR8 on Top Layer "VideoRayTrace" (solid, pour order 42): 4153.54,1171.61 4173.23,1151.93 4566.93,1151.93 4586.61,1171.61 4586.61,1722.79 4566.93,1742.48 4173.23,1742.48 4153.54,1722.79
MOTOR8KILL on Top Layer "VideoRayTrace" (solid, pour order 40): 3710.63,699.17 3730.31,679.49 4124.02,679.49 4143.7,699.17 4143.7,1486.57 4124.02,1506.26 3730.31,1506.26 3710.63,1486.57
GND on Top Layer "T100Trace" (solid, pour order 38): 3533.46,836.61 3533.46,994.1 3513.78,1013.78 3218.5,1013.78 3198.82,994.1 3198.82,836.61 3218.5,816.93 3513.78,816.93
GND on Top Layer "T100Trace" (solid, pour order 36): 2746.06,826.77 2746.06,984.25 2726.38,1003.94 2431.1,1003.94 2411.42,984.25 2411.42,826.77 2431.1,807.09 2726.38,807.09
GND on Top Layer "T100Trace" (solid, pour order 34): 4576.77,4222.44 4576.77,4064.96 4596.46,4045.28 4891.73,4045.28 4911.42,4064.96 4911.42,4222.44 4891.73,4242.13 4596.46,4242.13
GND on Top Layer "T100Trace" (solid, pour order 32): 3779.53,4222.44 3779.53,4064.96 3799.21,4045.28 4094.49,4045.28 4114.17,4064.96 4114.17,4222.44 4094.49,4242.13 3799.21,4242.13
GND on Top Layer "T100Trace" (solid, pour order 30): 1929.13,4222.44 1929.13,4064.96 1948.82,4045.28 2244.09,4045.28 2263.78,4064.96 2263.78,4222.44 2244.09,4242.13 1948.82,4242.13
GND on Top Layer "T100Trace" (solid, pour order 28): 2716.54,4222.44 2716.54,4064.96 2736.22,4045.28 3031.5,4045.28 3051.18,4064.96 3051.18,4222.44 3031.5,4242.13 2736.22,4242.13
MOTOR5 on Top Layer "T100Trace" (solid, pour order 24): 3248.03,1082.68 3405.51,1082.68 3425.2,1102.36 3425.2,1692.91 3405.51,1712.6 3257.87,1712.6 3228.35,1683.07 3228.35,1102.36
MOTOR6 on Top Layer "T100Trace" (solid, pour order 22): 2460.63,1082.68 2618.11,1082.68 2637.8,1102.36 2637.8,1692.91 2618.11,1712.6 2470.47,1712.6 2440.95,1683.07 2440.95,1102.36
MOTOR1 on Top Layer "T100Trace" (solid, pour order 20): 2066.93,3336.61 2224.41,3336.61 2244.09,3356.3 2244.09,3946.85 2224.41,3966.54 2076.77,3966.54 2047.24,3937.01 2047.24,3356.3
MOTOR2 on Top Layer "T100Trace" (solid, pour order 18): 2854.33,3326.77 3011.81,3326.77 3031.5,3346.46 3031.5,3937.01 3011.81,3956.69 2854.33,3956.69 2834.65,3937.01 2834.65,3346.46
MOTOR3 on Top Layer "T100Trace" (solid, pour order 16): 3917.32,3326.77 4068.31,3326.77 4094.49,3352.95 4094.49,3937.01 4074.8,3956.69 3917.32,3956.69 3897.64,3937.01 3897.64,3346.46
MOTOR4 on Top Layer "T100Trace" (solid, pour order 14): 4704.72,3326.77 4857.76,3326.77 4881.89,3350.91 4881.89,3937.01 4862.2,3956.69 4704.72,3956.69 4685.04,3937.01 4685.04,3346.46
POWERBOARD14.8V on Top Layer "Top Layer-No Net" (solid, pour order 0): 586.61,531.5 980.31,531.5 980.31,0.98 586.61,0.98
GENERAL14.8V on Top Layer "Top Layer-No Net" (solid, pour order 2): 78.74,531.5 472.44,531.5 472.44,0.98 78.74,0.98
NetJ2_1 on Top Layer "Top Layer-No Net" (solid, pour order 10): 17.72,1601.38 667.32,1601.38 923.23,1345.47 1061.02,1345.47 1061.02,1030.51 942.91,912.4 864.17,912.4 17.72,912.4
NetJ1_1 on Top Layer "Top Layer-No Net" (solid, pour order 12): 17.72,3491.14 667.32,3491.14 923.23,3235.24 1061.02,3235.24 1061.02,2920.28 942.91,2802.17 864.17,2802.17 17.72,2802.17
GND on Bottom Layer "GND" (solid, pour order 67): 0,4413.39 0,492.13 5500,492.13 5500,4413.39
GND on Bottom Layer "Power" (solid, pour order 63): 586.61,394.69 980.31,394.69 980.32,394.69 980.32,622.05 968.5,633.86 586.61,633.86
GND on Bottom Layer "Power" (solid, pour order 61): 78.74,394.69 78.74,610.24 78.74,394.69 472.44,394.69 472.44,618.11 86.61,618.11 78.74,610.24
GND on Bottom Layer "Top Layer-No Net" (solid, pour order 4): 586.61,394.69 980.31,394.69 980.31,0.98 586.61,0.98
GND on Bottom Layer "Top Layer-No Net" (solid, pour order 6): 78.74,394.69 472.44,394.69 472.44,0.98 78.74,0.98
no net on Bottom Layer "Top Layer-No Net" (solid, pour order 8): 78.74,394.69 78.74,0.98 472.44,0.98 472.44,394.69 78.74,394.69
no net on Bottom Solder "Top Layer-No Net" (solid): 586.61,394.69 980.31,394.69 980.31,0.98 586.61,0.98
no net on Bottom Solder "Top Layer-No Net" (solid): 78.74,394.69 472.44,394.69 472.44,0.98 78.74,0.98
no net on Top Solder "Top Layer-No Net" (solid): 586.61,394.69 980.31,394.69 980.31,0.98 586.61,0.98
no net on Top Solder "Top Layer-No Net" (solid): 78.74,394.69 472.44,394.69 472.44,0.98 78.74,0.98

## Keep-outs
Keep-Out Layer:
  the board outline again, w10

## Other copper
Top Layer:
  region net NetJ1_1: 1025.59,3234.25 1025.59,2919.29 1057.09,2919.29 1057.09,3234.25
  region net 14.8V: 1415.35,3299.21 1415.35,2901.57 1470.47,2901.57 1470.47,3299.21
  region net 14.8V: 1155.51,3291.34 1155.51,2909.45 1301.18,2909.45 1301.18,3291.34
  region: 284.84,713.58
  region: 284.84,713.58

## Silkscreen, mask and mechanical layers (free items; w line width, h text height)
Top Overlay:
  circle w9.84: c925.24,3265.75 r4.92
  lines w7.87: 978.84,2903.54 978.84,2893.7 1399.61,2893.7 1399.61,2913.39 ; 978.84,3297.24 978.84,3307.09 1399.61,3307.09 1399.61,3287.4
  text "Bat1 (-)" at 637.8,3901.57 h27.95 r90
  text "Motor1 (+)" at 1944.88,3220.47 h27.95
  text "Motor1 (-)" at 2456.69,3216.54 h27.95
  text "Motor4 (+)" at 4614.17,3212.6 h27.95
  text "Motor2 (+)" at 2759.84,3208.66 h27.95
  text "Motor3 (+)" at 3830.71,3208.66 h27.95
  text "Motor4 (-)" at 5125.98,3208.66 h27.95
  text "Motor2 (-)" at 3271.65,3204.72 h27.95
  text "Motor3 (-)" at 4342.52,3204.72 h27.95
  text "vTeensyKill" at 2578.74,3027.56 h27.95
  text "Bat1 (+)" at 661.42,2921.26 h27.95 r90
  text "KillSwitchOutput" at 1275.59,2791.34 h27.95
  text "5V" at 1232.28,2527.56 h27.95
  text "Switch" at 1236.22,2181.1 h27.95 r270
  text "Bat2 (-)" at 637.8,2035.43 h27.95 r90
  text "Motor9 (-)" at 4637.8,1944.88 h27.95
  text "Motor1 (+)" at 5149.61,1940.94 h27.95
  text "Motor10 (-)" at 3712.6,1937.01 h27.95
  text "Motor10 (+)" at 4224.41,1933.07 h27.95
  text "Motor6 (+)" at 2437.01,1586.61 h27.95
  text "Motor6 (-)" at 1988.19,1582.68 h27.95
  text "Motor5 (-)" at 2803.15,1574.8 h27.95
  text "Motor5 (+)" at 3248.03,1570.87 h27.95
  text "Bat2 (+)" at 661.42,1055.12 h27.95 r90
Mechanical 13:
  lines w3.94: 978.84,2905.51 1438.48,2905.51 1438.48,3295.28 978.84,3295.28 978.84,2905.51
Mechanical 15:
  lines w1.97: 942.91,2889.76 942.91,3311.02 1474.41,3311.02 1474.41,2889.76 942.91,2889.76
  lines w3.94: 1188.98,3100.39 1228.35,3100.39 ; 1208.66,3080.71 1208.66,3120.08